# Altium PCB ERM_OPTO_Long.PcbDoc (part 1 of 2)
Units mil, origin at the board's own origin, x right, y up, seen from the top; angles counter-clockwise.
Board outline 4606.3 x 1102.36 mil, 7 copper layers (Layer_1 Top, Layer_2 GND Plane 1, Layer_3 Inner Signal 1, Layer_4 GND Plane 2, Layer_5 Inner Signal 2, Layer_6 GND Plane 3, Layer_7 Bottom), stack 37.12 mil thick; 33 components, 65 nets, 204 pads, 130 vias.
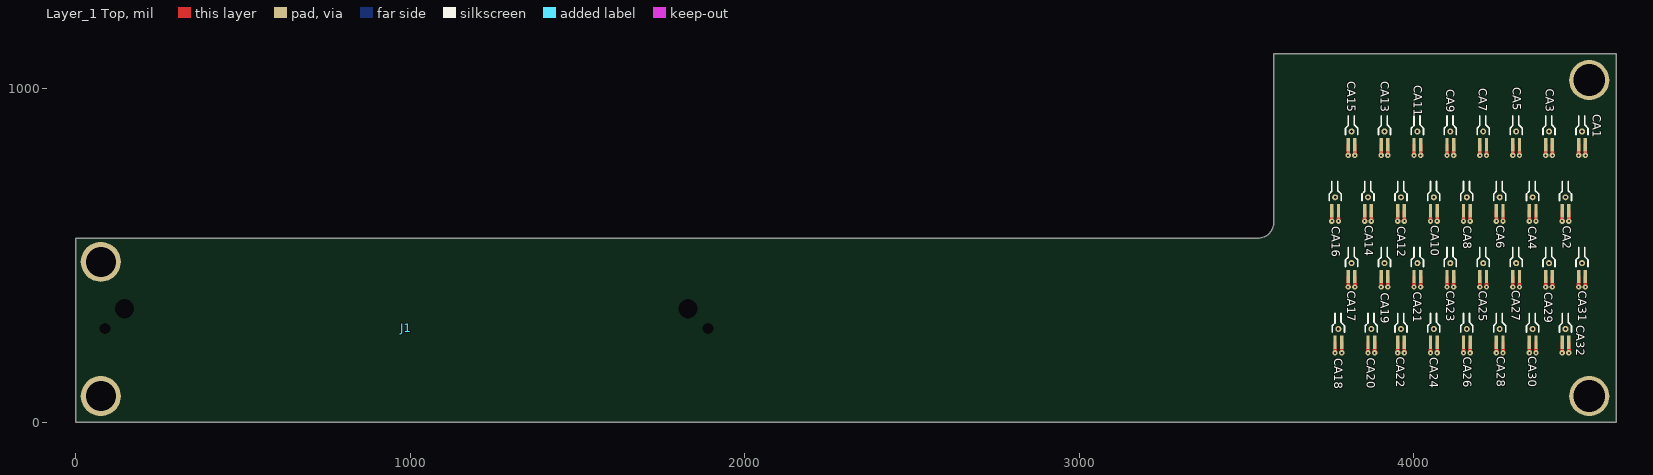
[diagram p0: Layer_1 Top view]
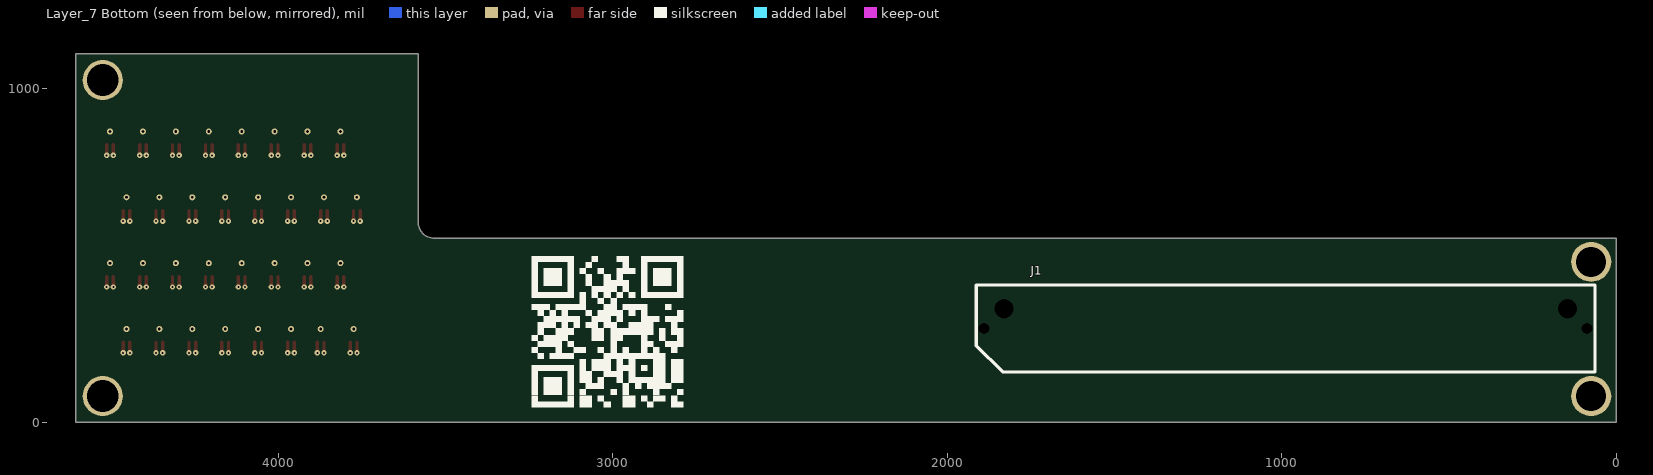
[diagram p1: Layer_7 Bottom view, seen from below]
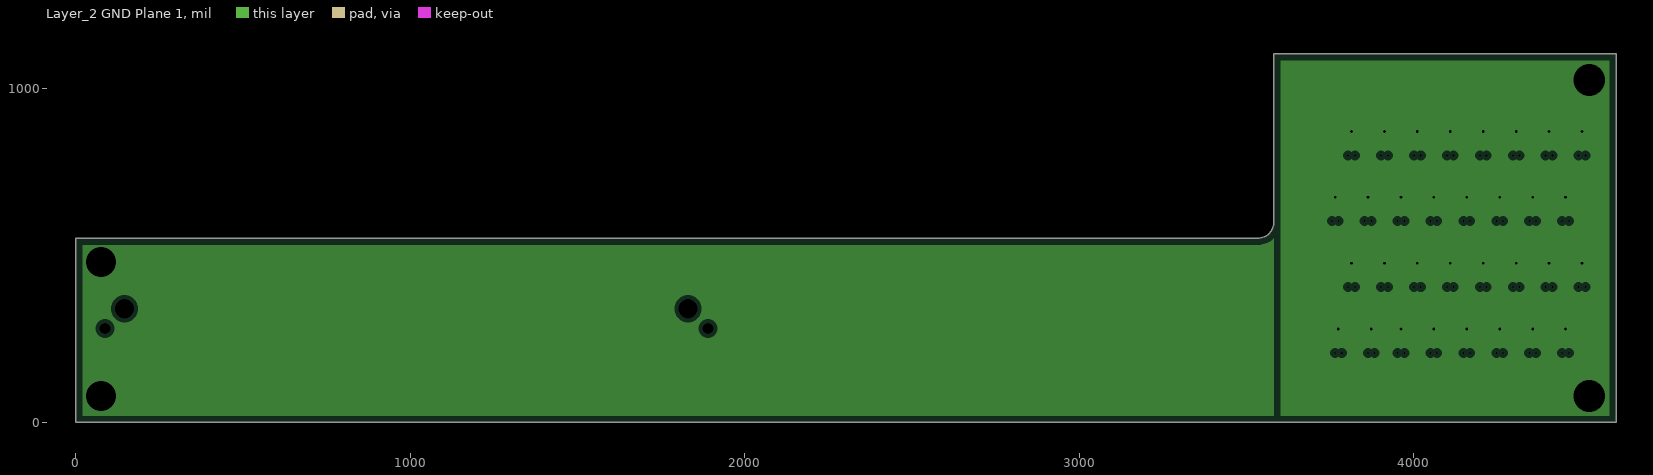
[diagram p2: Layer_2 GND Plane 1, clearances drawn from the general rule]
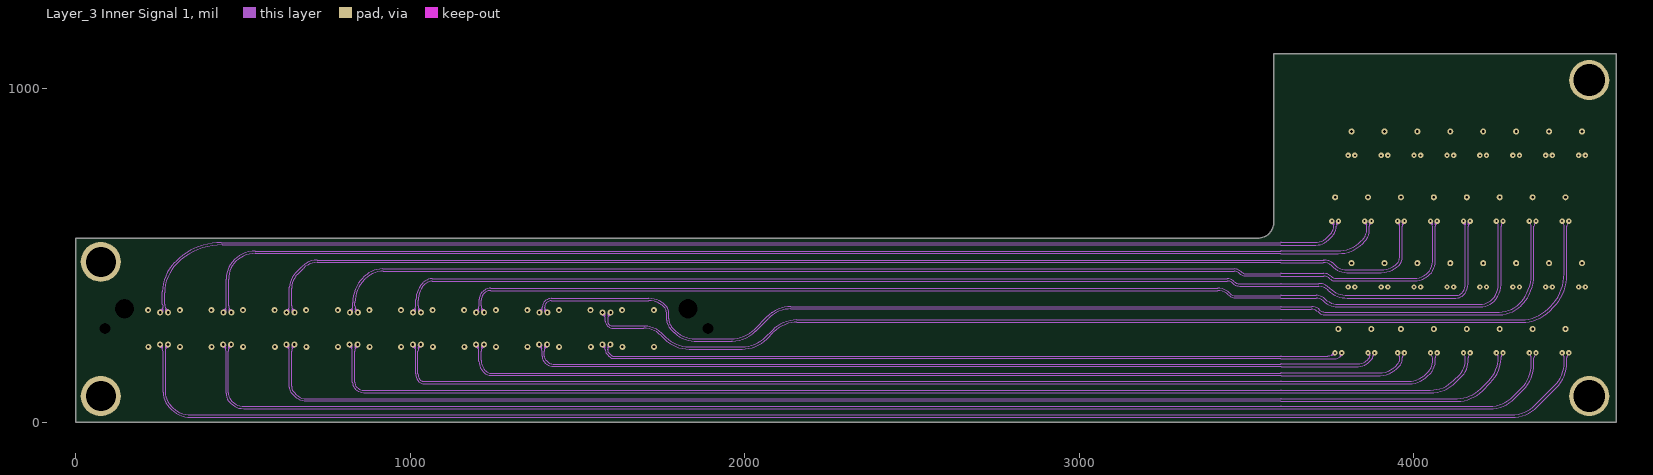
[diagram p3: Layer_3 Inner Signal 1]
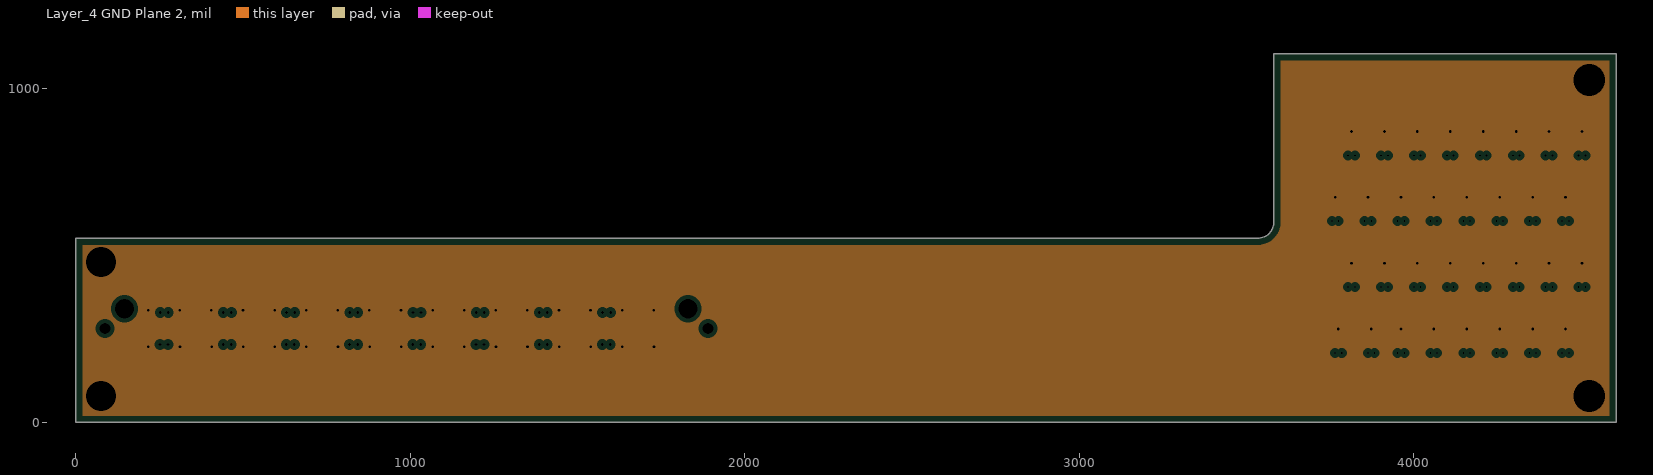
[diagram p4: Layer_4 GND Plane 2, clearances drawn from the general rule]
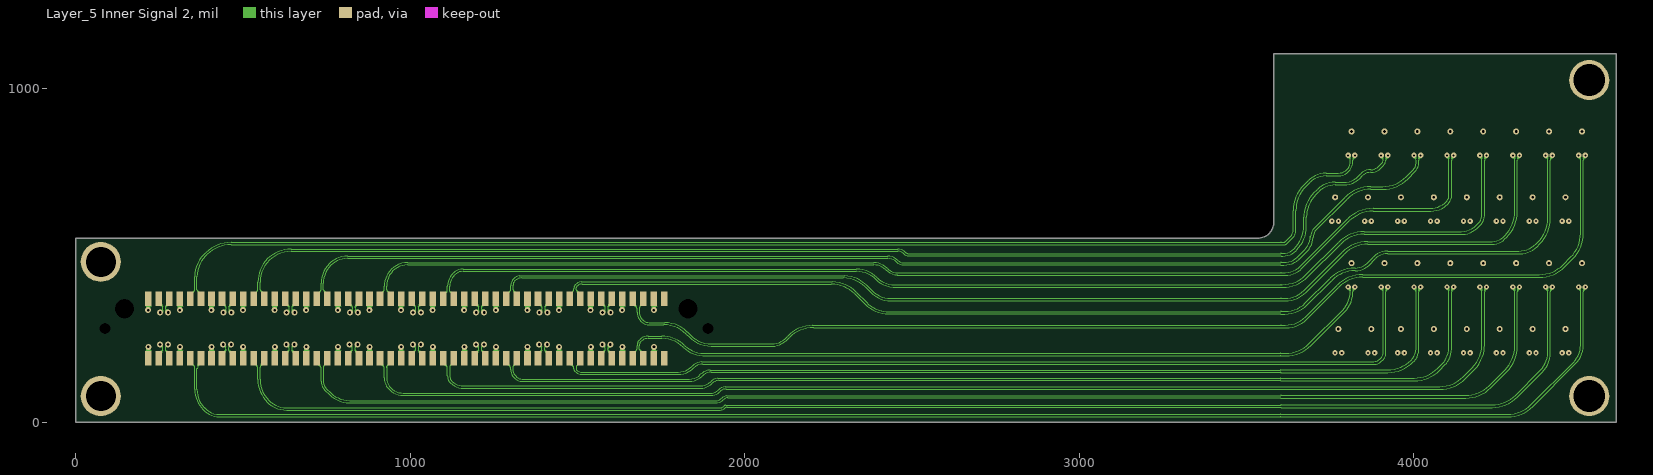
[diagram p5: Layer_5 Inner Signal 2]
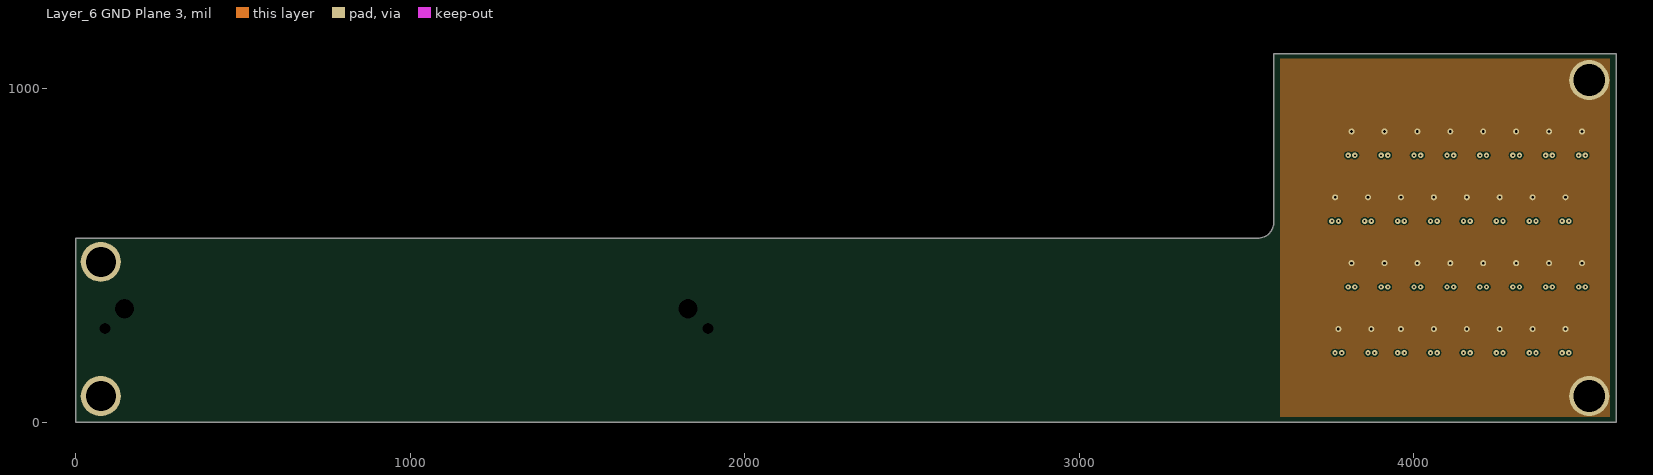
[diagram p6: Layer_6 GND Plane 3]

## Layer stack, top to bottom
Flex Region Top Coverlay 1: solder mask 0.4, Solder Resist, Dk 3.5
Flex Region Top Coverlay 1: solder mask 0.472, FC-002, Dk 3.9
Layer_1 Top: signal copper 0.7
Dielectric 1: core 6.6, I-TERA MT40, Dk 3.45
Layer_2 GND Plane 1: plane copper 1.4, net GND
Dielectric 2: prepreg 2.76, Composite dielectric, Dk 3.48
Dielectric 2a: prepreg 4.2, FR0110, Dk 3.9
Layer_3 Inner Signal 1: signal copper 0.5
Dielectric 3: prepreg 3, Composite dielectric, Dk 3
Dielectric 3a: prepreg 0.9, Composite dielectric, Dk 3
Layer_4 GND Plane 2: plane copper 0.5, net GND
Dielectric 4: core 3, RF775-RA, Dk 3
Layer_5 Inner Signal 2: signal copper 0.5
Dielectric 5: prepreg 1.6, Composite dielectric, Dk 3.48
Dielectric 5a: prepreg 2.76, Composite dielectric, Dk 3.48
Layer_6 GND Plane 3: signal copper 1.4
Dielectric 6: core 6.6, I-TERA MT40, Dk 3.45
Layer_7 Bottom: signal copper 0.7
Flex Region Bottom Coverlay 1: solder mask 0.05, FC-100, Dk 3.4

## Board outline
3582.68,598.43 3581.81,591.54 3580.71,586.76 3579.87,583.71 3578.74,580.83 3577.76,578.74 3576.82,576.75 3575.88,574.76 3574.8,572.83 3571.77,568.96 3569.71,566.07 3565.87,562.23 3560.04,558.07 3554.13,555.12 3549.31,553.15 3544.29,552.17 3539.28,551.18 3531.5,551.18 0,551.18 0,0 4606.3,0 4606.3,1102.36 3582.68,1102.36
board region "Default Layer Stack Region": 1968.5,0 0,0 0,551.18 1968.5,551.18
board region "Default Layer Stack Region": 3582.68,0 1968.5,0 1968.5,551.18 3531.5,551.18 3539.28,551.18 3544.29,552.17 3549.31,553.15 3554.13,555.12 3560.04,558.07 3565.87,562.23 3569.71,566.07 3571.77,568.96 3574.8,572.83 3575.88,574.76 3576.82,576.75 3577.76,578.74 3578.74,580.83 3579.87,583.71 3580.71,586.76 3581.81,591.54 3582.68,598.43
board region "Default Layer Stack Region": 3582.68,1102.36 4606.3,1102.36 4606.3,0 3582.68,0

## Design rules (kind name [scope] priority, off if disabled: settings)
Clearance [All] p1: gap=4 ignorepadtopadclearanceinfootprint=FALSE except(3.74: Arc-Arc Arc-Track Arc-SMDPad Track-Track Track-SMDPad SMDPad-SMDPad; 4.02: Arc-Hole Track-Hole SMDPad-Hole Via-Hole Fill-Hole Poly-Hole Region-Hole Text-Hole; 7.56: THPad-Hole)
ComponentClearance [All] p1: gap=0 collisioncheckmode=3 verticalgap=0 showdistances=FALSE
DiffPairsRouting "DiffPairsRouting L1" [InDifferentialPairClass('All Differential Pairs')] p1: maxlimit=20 minlimit=3 mostfreqgap=10 toplayer_mingap=10 toplayer_minwidth=10 toplayer_maxwidth=20 toplayer_prefwidth=10 midlayer1_mingap=3.74 midlayer1_prefgap=3.74 midlayer1_minwidth=2.95 midlayer1_maxwidth=20 midlayer1_prefwidth=2.97 midlayer2_mingap=3.74 midlayer2_prefgap=3.74 midlayer2_minwidth=2.95 midlayer2_maxwidth=20 midlayer2_prefwidth=2.97 midlayer3_prefgap=5 midlayer3_minwidth=1 midlayer3_maxwidth=20 midlayer3_prefwidth=5.5 bottomlayer_mingap=10 bottomlayer_minwidth=10 bottomlayer_maxwidth=20 bottomlayer_prefwidth=10 substack1={8003F175-BBFD-4856-87BE-DD2012BE8F80} toplayer_{8003f175-bbfd-4856-87be-dd2012be8f80}_mingap=5.12 toplayer_{8003f175-bbfd-4856-87be-dd2012be8f80}_prefgap=5.12 toplayer_{8003f175-bbfd-4856-87be-dd2012be8f80}_minwidth=2.95 toplayer_{8003f175-bbfd-4856-87be-dd2012be8f80}_maxwidth=15 toplayer_{8003f175-bbfd-4856-87be-dd2012be8f80}_prefwidth=2.95 midlayer1_{8003f175-bbfd-4856-87be-dd2012be8f80}_mingap=5.12 midlayer1_{8003f175-bbfd-4856-87be-dd2012be8f80}_prefgap=5.12 midlayer1_{8003f175-bbfd-4856-87be-dd2012be8f80}_minwidth=2.95 midlayer1_{8003f175-bbfd-4856-87be-dd2012be8f80}_maxwidth=15 midlayer1_{8003f175-bbfd-4856-87be-dd2012be8f80}_prefwidth=2.95 midlayer2_{8003f175-bbfd-4856-87be-dd2012be8f80}_mingap=5.12 midlayer2_{8003f175-bbfd-4856-87be-dd2012be8f80}_prefgap=5.12 midlayer2_{8003f175-bbfd-4856-87be-dd2012be8f80}_minwidth=2.95 midlayer2_{8003f175-bbfd-4856-87be-dd2012be8f80}_maxwidth=15 midlayer2_{8003f175-bbfd-4856-87be-dd2012be8f80}_prefwidth=2.95 midlayer3_{8003f175-bbfd-4856-87be-dd2012be8f80}_mingap=5.12 midlayer3_{8003f175-bbfd-4856-87be-dd2012be8f80}_prefgap=5.12 midlayer3_{8003f175-bbfd-4856-87be-dd2012be8f80}_minwidth=2.95 midlayer3_{8003f175-bbfd-4856-87be-dd2012be8f80}_maxwidth=15 midlayer3_{8003f175-bbfd-4856-87be-dd2012be8f80}_prefwidth=2.95 bottomlayer_{8003f175-bbfd-4856-87be-dd2012be8f80}_mingap=5.12 bottomlayer_{8003f175-bbfd-4856-87be-dd2012be8f80}_prefgap=5.12 bottomlayer_{8003f175-bbfd-4856-87be-dd2012be8f80}_minwidth=2.95 bottomlayer_{8003f175-bbfd-4856-87be-dd2012be8f80}_maxwidth=15 bottomlayer_{8003f175-bbfd-4856-87be-dd2012be8f80}_prefwidth=2.95 maxuncoupledlength=1000
DiffPairsRouting "DiffPairsRouting L3" [InDifferentialPairClass('All Differential Pairs')] p2: maxlimit=20 minlimit=3 mostfreqgap=10 toplayer_mingap=10 toplayer_minwidth=10 toplayer_maxwidth=20 toplayer_prefwidth=10 midlayer1_mingap=3.74 midlayer1_prefgap=3.74 midlayer1_minwidth=2.95 midlayer1_maxwidth=20 midlayer1_prefwidth=2.97 midlayer2_mingap=3.74 midlayer2_prefgap=3.74 midlayer2_minwidth=2.95 midlayer2_maxwidth=20 midlayer2_prefwidth=2.97 midlayer3_prefgap=5 midlayer3_minwidth=1 midlayer3_maxwidth=20 midlayer3_prefwidth=5.5 bottomlayer_mingap=10 bottomlayer_minwidth=10 bottomlayer_maxwidth=20 bottomlayer_prefwidth=10 substack1={8003F175-BBFD-4856-87BE-DD2012BE8F80} toplayer_{8003f175-bbfd-4856-87be-dd2012be8f80}_mingap=5.12 toplayer_{8003f175-bbfd-4856-87be-dd2012be8f80}_prefgap=5.12 toplayer_{8003f175-bbfd-4856-87be-dd2012be8f80}_minwidth=2.95 toplayer_{8003f175-bbfd-4856-87be-dd2012be8f80}_maxwidth=15 toplayer_{8003f175-bbfd-4856-87be-dd2012be8f80}_prefwidth=2.95 midlayer1_{8003f175-bbfd-4856-87be-dd2012be8f80}_mingap=5.12 midlayer1_{8003f175-bbfd-4856-87be-dd2012be8f80}_prefgap=5.12 midlayer1_{8003f175-bbfd-4856-87be-dd2012be8f80}_minwidth=2.95 midlayer1_{8003f175-bbfd-4856-87be-dd2012be8f80}_maxwidth=15 midlayer1_{8003f175-bbfd-4856-87be-dd2012be8f80}_prefwidth=2.95 midlayer2_{8003f175-bbfd-4856-87be-dd2012be8f80}_mingap=5.12 midlayer2_{8003f175-bbfd-4856-87be-dd2012be8f80}_prefgap=5.12 midlayer2_{8003f175-bbfd-4856-87be-dd2012be8f80}_minwidth=2.95 midlayer2_{8003f175-bbfd-4856-87be-dd2012be8f80}_maxwidth=15 midlayer2_{8003f175-bbfd-4856-87be-dd2012be8f80}_prefwidth=2.95 midlayer3_{8003f175-bbfd-4856-87be-dd2012be8f80}_mingap=5.12 midlayer3_{8003f175-bbfd-4856-87be-dd2012be8f80}_prefgap=5.12 midlayer3_{8003f175-bbfd-4856-87be-dd2012be8f80}_minwidth=2.95 midlayer3_{8003f175-bbfd-4856-87be-dd2012be8f80}_maxwidth=15 midlayer3_{8003f175-bbfd-4856-87be-dd2012be8f80}_prefwidth=2.95 bottomlayer_{8003f175-bbfd-4856-87be-dd2012be8f80}_mingap=5.12 bottomlayer_{8003f175-bbfd-4856-87be-dd2012be8f80}_prefgap=5.12 bottomlayer_{8003f175-bbfd-4856-87be-dd2012be8f80}_minwidth=2.95 bottomlayer_{8003f175-bbfd-4856-87be-dd2012be8f80}_maxwidth=15 bottomlayer_{8003f175-bbfd-4856-87be-dd2012be8f80}_prefwidth=2.95 maxuncoupledlength=1000
HoleSize [All] p1: absolutevalues=TRUE maxlimit=300 minlimit=5 maxpercent=80.000 minpercent=20.000
HoleToHoleClearance [All] p1: gap=8 allowstackedmicrovias=TRUE
MinimumSolderMaskSliver [All] p1: minsoldermaskwidth=2
NetAntennae [All] p1: netantennaetolerance=1
PlaneClearance [All] p1: clearance=12
PlaneConnect [All] p1: planeconnectstyle=Direct reliefexpansion=12 reliefentries=4 reliefconductorwidth=12 reliefairgap=10
PlaneConnect PlaneConnect_VIA [All] p2: planeconnectstyle=Direct reliefexpansion=15 reliefentries=4 reliefconductorwidth=12 reliefairgap=10
PolygonConnect [ispad] p1: connectstyle=Direct reliefconductorwidth=12 reliefentries=4 polygonreliefangle="45 Angle" airgapwidth=10
PolygonConnect PolygonConnect_VIA [isvia] p2: connectstyle=Direct reliefconductorwidth=12 reliefentries=4 polygonreliefangle="90 Angle" airgapwidth=10
RoutingCorners [All] p1: cornerstyle=45-Degree minsetback=50 maxsetback=50
RoutingVias [All] p1: holewidth=8 width=18 viastyle="Through Hole" minholewidth=5 minwidth=10 maxholewidth=100 maxwidth=200
RoutingVias RoutingVias_1 [All] p2: holewidth=8 width=18 viastyle="Through Hole" minholewidth=6 minwidth=12 maxholewidth=100 maxwidth=200
SilkToSilkClearance [All] p1: silktosilkclearance=1
SilkToSolderMaskClearance SilkscreenOverComponentPads [IsPad] p1: minsilkscreentomaskgap=1 clearancetoexposedcopper=TRUE
SolderMaskExpansion [All] p1: expansion=2 istentingtop=FALSE
Width [All] p1: maxlimit=100 minlimit=1 preferedwidth=8 substack1={8003F175-BBFD-4856-87BE-DD2012BE8F80} minimp=50.000000 maximp=50.000000 favimp=50.000000
19 further rules are at their usual default settings.

## Classes and differential pairs
differential pair DOWNLINK6: +DOWNLINK6_P -DOWNLINK6_N
differential pair UPLINK23: +UPLINK23_P -UPLINK23_N
differential pair UPLINK22: +UPLINK22_P -UPLINK22_N
differential pair UPLINK21: +UPLINK21_P -UPLINK21_N
differential pair UPLINK20: +UPLINK20_P -UPLINK20_N
differential pair UPLINK19: +UPLINK19_P -UPLINK19_N
differential pair UPLINK18: +UPLINK18_P -UPLINK18_N
differential pair UPLINK17: +UPLINK17_P -UPLINK17_N
differential pair UPLINK16: +UPLINK16_P -UPLINK16_N
differential pair UPLINK15: +UPLINK15_P -UPLINK15_N
differential pair UPLINK14: +UPLINK14_P -UPLINK14_N
differential pair UPLINK13: +UPLINK13_P -UPLINK13_N
differential pair UPLINK12: +UPLINK12_P -UPLINK12_N
differential pair UPLINK11: +UPLINK11_P -UPLINK11_N
differential pair UPLINK10: +UPLINK10_P -UPLINK10_N
differential pair UPLINK9: +UPLINK9_P -UPLINK9_N
differential pair UPLINK8: +UPLINK8_P -UPLINK8_N
differential pair UPLINK7: +UPLINK7_P -UPLINK7_N
differential pair UPLINK6: +UPLINK6_P -UPLINK6_N
differential pair UPLINK5: +UPLINK5_P -UPLINK5_N
differential pair UPLINK4: +UPLINK4_P -UPLINK4_N
differential pair UPLINK3: +UPLINK3_P -UPLINK3_N
differential pair UPLINK2: +UPLINK2_P -UPLINK2_N
differential pair UPLINK1: +UPLINK1_P -UPLINK1_N
differential pair UPLINK0: +UPLINK0_P -UPLINK0_N
differential pair DOWNLINK7: +DOWNLINK7_P -DOWNLINK7_N
differential pair DOWNLINK5: +DOWNLINK5_P -DOWNLINK5_N
differential pair DOWNLINK4: +DOWNLINK4_P -DOWNLINK4_N
differential pair DOWNLINK3: +DOWNLINK3_P -DOWNLINK3_N
differential pair DOWNLINK2: +DOWNLINK2_P -DOWNLINK2_N
differential pair DOWNLINK1: +DOWNLINK1_P -DOWNLINK1_N
differential pair DOWNLINK0: +DOWNLINK0_P -DOWNLINK0_N

## Components (designator, comment, footprint, x,y, rotation, side; value= is the part's Value field where it differs from the comment)
CA1 "Molex_Cable_100068-0052" MOLEX_CABLE_100068-0052_NO_VIA 4503.94,870.08 r270 top
CA2 "Molex_Cable_100068-0052" MOLEX_CABLE_100068-0052_NO_VIA 4454.72,673.23 r270 top
CA3 "Molex_Cable_100068-0052" MOLEX_CABLE_100068-0052_NO_VIA 4405.51,870.08 r270 top
CA4 "Molex_Cable_100068-0052" MOLEX_CABLE_100068-0052_NO_VIA 4356.3,673.23 r270 top
CA5 "Molex_Cable_100068-0052" MOLEX_CABLE_100068-0052_NO_VIA 4307.09,870.08 r270 top
CA6 "Molex_Cable_100068-0052" MOLEX_CABLE_100068-0052_NO_VIA 4257.87,673.23 r270 top
CA7 "Molex_Cable_100068-0052" MOLEX_CABLE_100068-0052_NO_VIA 4208.66,870.08 r270 top
CA8 "Molex_Cable_100068-0052" MOLEX_CABLE_100068-0052_NO_VIA 4159.45,673.23 r270 top
CA9 "Molex_Cable_100068-0052" MOLEX_CABLE_100068-0052_NO_VIA 4110.24,870.08 r270 top
CA10 "Molex_Cable_100068-0052" MOLEX_CABLE_100068-0052_NO_VIA 4061.02,673.23 r270 top
CA11 "Molex_Cable_100068-0052" MOLEX_CABLE_100068-0052_NO_VIA 4011.81,870.08 r270 top
CA12 "Molex_Cable_100068-0052" MOLEX_CABLE_100068-0052_NO_VIA 3962.6,673.23 r270 top
CA13 "Molex_Cable_100068-0052" MOLEX_CABLE_100068-0052_NO_VIA 3913.39,870.08 r270 top
CA14 "Molex_Cable_100068-0052" MOLEX_CABLE_100068-0052_NO_VIA 3864.17,673.23 r270 top
CA15 "Molex_Cable_100068-0052" MOLEX_CABLE_100068-0052_NO_VIA 3814.96,870.08 r270 top
CA16 "Molex_Cable_100068-0052" MOLEX_CABLE_100068-0052_NO_VIA 3765.75,673.23 r270 top
CA17 "Molex_Cable_100068-0052" MOLEX_CABLE_100068-0052_NO_VIA 3814.96,476.38 r270 top
CA18 "Molex_Cable_100068-0052" MOLEX_CABLE_100068-0052_NO_VIA 3775.59,279.53 r270 top
CA19 "Molex_Cable_100068-0052" MOLEX_CABLE_100068-0052_NO_VIA 3913.39,476.38 r270 top
CA20 "Molex_Cable_100068-0052" MOLEX_CABLE_100068-0052_NO_VIA 3874.02,279.53 r270 top
CA21 "Molex_Cable_100068-0052" MOLEX_CABLE_100068-0052_NO_VIA 4011.81,476.38 r270 top
CA22 "Molex_Cable_100068-0052" MOLEX_CABLE_100068-0052_NO_VIA 3962.6,279.53 r270 top
CA23 "Molex_Cable_100068-0052" MOLEX_CABLE_100068-0052_NO_VIA 4110.24,476.38 r270 top
CA24 "Molex_Cable_100068-0052" MOLEX_CABLE_100068-0052_NO_VIA 4061.02,279.53 r270 top
CA25 "Molex_Cable_100068-0052" MOLEX_CABLE_100068-0052_NO_VIA 4208.66,476.38 r270 top
CA26 "Molex_Cable_100068-0052" MOLEX_CABLE_100068-0052_NO_VIA 4159.45,279.53 r270 top
CA27 "Molex_Cable_100068-0052" MOLEX_CABLE_100068-0052_NO_VIA 4307.09,476.38 r270 top
CA28 "Molex_Cable_100068-0052" MOLEX_CABLE_100068-0052_NO_VIA 4257.87,279.53 r270 top
CA29 "Molex_Cable_100068-0052" MOLEX_CABLE_100068-0052_NO_VIA 4405.51,476.38 r270 top
CA30 "Molex_Cable_100068-0052" MOLEX_CABLE_100068-0052_NO_VIA 4356.3,279.53 r270 top
CA31 "Molex_Cable_100068-0052" MOLEX_CABLE_100068-0052_NO_VIA 4503.94,476.38 r270 top
CA32 "Molex_Cable_100068-0052" MOLEX_CABLE_100068-0052_NO_VIA 4454.72,279.53 r270 top
J1 "ERF8-050-XX.X-X-DV" ERF8-050-XX.X-X-DV 988.48,280.92 r0 top

## Footprints (in the part's own frame and the unit in brackets; to place one, negate y for a bottom-side part, rotate by r counter-clockwise, add the part's x,y. Pads: shape width x height; smd on the part's side, far side on the other; paste and mask are expansions set on the pad)
ERF8-050-XX.X-X-DV [mm]
  rect 0.5x1.1 on Mid2 mask+0.05: 1(19.6,-2.25) 2(19.6,2.25) 3(18.8,-2.25) 4(18.8,2.25) 5(18,-2.25) 6(18,2.25) 7(17.2,-2.25) 8(17.2,2.25) 9(16.4,-2.25) 10(16.4,2.25) 11(15.6,-2.25) 12(15.6,2.25) 13(14.8,-2.25) 14(14.8,2.25) 15(14,-2.25) 16(14,2.25) 17(13.2,-2.25) 18(13.2,2.25) 19(12.4,-2.25) 20(12.4,2.25) 21(11.6,-2.25) 22(11.6,2.25) 23(10.8,-2.25) 24(10.8,2.25) 25(10,-2.25) 26(10,2.25) 27(9.2,-2.25) 28(9.2,2.25) 29(8.4,-2.25) 30(8.4,2.25) 31(7.6,-2.25) 32(7.6,2.25) 33(6.8,-2.25) 34(6.8,2.25) 35(6,-2.25) 36(6,2.25) 37(5.2,-2.25) 38(5.2,2.25) 39(4.4,-2.25) 40(4.4,2.25) 41(3.6,-2.25) 42(3.6,2.25) 43(2.8,-2.25) 44(2.8,2.25) 45(2,-2.25) 46(2,2.25) 47(1.2,-2.25) 48(1.2,2.25) 49(0.4,-2.25) 50(0.4,2.25) 51(-0.4,-2.25) 52(-0.4,2.25) 53(-1.2,-2.25) 54(-1.2,2.25) 55(-2,-2.25) 56(-2,2.25) 57(-2.8,-2.25) 58(-2.8,2.25) 59(-3.6,-2.25) 60(-3.6,2.25) 61(-4.4,-2.25) 62(-4.4,2.25) 63(-5.2,-2.25) 64(-5.2,2.25) 65(-6,-2.25) 66(-6,2.25) 67(-6.8,-2.25) 68(-6.8,2.25) 69(-7.6,-2.25) 70(-7.6,2.25) 71(-8.4,-2.25) 72(-8.4,2.25) 73(-9.2,-2.25) 74(-9.2,2.25) 75(-10,-2.25) 76(-10,2.25) 77(-10.8,-2.25) 78(-10.8,2.25) 79(-11.6,-2.25) 80(-11.6,2.25) 81(-12.4,-2.25) 82(-12.4,2.25) 83(-13.2,-2.25) 84(-13.2,2.25) 85(-14,-2.25) 86(-14,2.25) 87(-14.8,-2.25) 88(-14.8,2.25) 89(-15.6,-2.25) 90(-15.6,2.25) 91(-16.4,-2.25) 92(-16.4,2.25) 93(-17.2,-2.25) 94(-17.2,2.25) 95(-18,-2.25) 96(-18,2.25) 97(-18.8,-2.25) 98(-18.8,2.25) 99(-19.6,-2.25) 100(-19.6,2.25)
  round 0 hole 1.45 unplated: MH1(21.4,1.5) MH2(-21.4,1.5)
  round 0 hole 0.83 unplated: MH2(-22.9,0) MH2(22.9,0)
  body extent -23.75,-2.8 23.75,2.8, height 5.3
MOLEX_CABLE_100068-0052_NO_VIA [mil] "SM1206 EMI Filter"
  rect 40x10 smd: 1(40,10) 2(40,-10)
  round 18 hole 8: 3(0,0)
  silkscreen extent -47,-18 10,18

## Part data
CA1 CA2 CA3 CA4 CA5 CA6 CA7 CA8 CA9 CA10 CA11 CA12 CA13 CA14 CA15 CA16 CA17 CA18 CA19 CA20 CA21 CA22 CA23 CA24 CA25 CA26 CA27 CA28 CA29 CA30 CA31 CA32: library part Molex_Cable_100068-0052_No_Via, "Molex; 100068-0052, Twinax Cable 34AWG 100 Ohms", Manufacturer=Molex, Manufacturer Part Number=100068-0052, Package / Case=Molex_100068-0052, Unit_Price_Static=25.00
J1: "Socket Assembly, Double Row Vertical, Surface Mount, 0.8mm Pitch, 100 Pins", Manufacturer=SAMTEC, Manufacturer Part Number=ERF8-050-05.0-S-DV, CREATED="October 23, 2014 - Wendy Xin", Package / Case=ERF8-050-05.0-S-DV, PCB DECAL=ERF8-050-XX.X-X-DV, Unit_Price_Static=7.00

## Free pads (board coordinates)
  round 120 hole 90: 1(74.8,78.74) 1(74.8,480.32)
  round 120 hole 95: 1(4525.59,78.74) 1(4525.59,1023.62)

## Via types
v1: diameter 18, hole 8, Layer_3 Inner Signal 1 to Layer_5 Inner Signal 2, tented both sides, 66 vias
v2: diameter 16, hole 6, Layer_1 Top to Layer_7 Bottom, tented both sides, 64 vias

## Nets (pads, with @x,y where several pads share a name; then routed paths per layer and width w, separated by ;. In a path a pad name is that pad's centre, name@x,y a point inside that pad or via, vN(x,y) a via of type N, cw(c..) or ccw(c..) an arc to the next point about the centre after c; other vN are vias at no path point)
DOWNLINK0_N: CA24.1 J1.49 | length 3298
  Layer_1 Top w10: v2(4071.02,208.03) CA24.1@4071.02,239.53
  Layer_3 Inner Signal 1 w2.95: v1(1007.69,233.27) cw(c986.79,212.38) 1016.34,212.38 1016.34,145.25 ccw(c1049.21,145.25) 1025.97,122.01 1026.06,121.91 ccw(c1040.18,136.03) 1040.18,116.06 1087.28,116.06 3582.72,116.06 3602.52,116.06 cw(c3602.52,114.37) 3603.72,115.57 3603.99,115.3 3987.85,115.3 ccw(c3987.85,191.06) 4041.42,137.49 4051.22,147.29 ccw(c4017.82,180.69) 4051.26,147.33 ccw(c4017.82,180.69) 4065.06,180.69 4065.06,193.63 cw(c4079.9,193.63) 4066.77,200.55 cw(c4079.9,193.63) 4069.41,204.12 ccw(c4065.5,208.03) v2(4071.02,208.03)
  Layer_5 Inner Signal 2 w3: J1.49@1004.23,192.33 cw(c1032.75,192.33) 1012.58,212.5 1013.74,213.65 ccw(c1007.95,219.44) 1016.14,219.44 ccw(c1003.17,219.44) 1012.34,228.62 v1(1007.69,233.27)
DOWNLINK0_P: CA24.2 J1.47 | length 3281
  Layer_1 Top w10: v2(4051.02,208.03) CA24.2@4051.02,239.53
  Layer_3 Inner Signal 1 w2.95: v1(1031.69,233.27) ccw(c1052.58,212.38) 1023.03,212.38 1023.03,145.32 ccw(c1049.38,145.32) 1030.75,126.69 ccw(c1040.25,136.2) 1040.25,122.76 3582.64,122.76 3602.52,122.76 cw(c3604,121.28) 3604,123.37 3626.96,123.37 3682.51,123.37 3963.66,123.37 3984.51,123.37 ccw(c3984.51,199.13) 4038.05,145.53 ; 4038.08,145.56 4045.47,152.95 ccw(c4017.67,180.75) 4056.99,180.75 4056.99,193.63 ccw(c4042.15,193.63) 4055.28,200.55 ccw(c4042.15,193.63) 4052.64,204.12 cw(c4056.55,208.03) v2(4051.02,208.03)
  Layer_5 Inner Signal 2 w3: v1(1031.69,233.27) 1026.71,228.29 ccw(c1034.77,220.23) 1023.37,220.23 ccw(c1032.37,220.23) 1026.01,213.87 cw(c1006.45,194.31) 1034.11,194.31 J1.47@1034.11,201.4 ; J1.47@1034.36,193.71 J1.47@1035.73,192.33
DOWNLINK1_N: CA17.2 J1.7 | length 2343.9
  Layer_1 Top w10: v2(3804.96,404.88) CA17.2@3804.96,436.38
  Layer_5 Inner Signal 2 w2.95: J1.7@1665.65,192.33 cw(c1695.28,192.33) 1674.33,213.28 1675.21,214.17 ccw(c1667.52,221.86) 1678.4,221.86 1678.4,229.64 cw(c1710.36,229.64) 1679.73,238.79 ; 1678.4,232.13 cw(c1695.66,232.13) 1679.73,238.79 ; v2(3804.96,404.88) ccw(c3810.49,404.88) 3806.58,400.97 cw(c3796.09,390.48) 3810.93,390.48 cw(c3734.15,390.48) 3809.49,375.71 cw(c3734.15,390.48) 3788.44,336.19 3688.34,236.1 cw(c3617.63,306.81) 3617.63,206.81 3603.8,206.81 ccw(c3603.8,204.72) 3602.32,206.2 1877.52,206.2 cw(c1877.52,285.42) 1821.5,229.4 ccw(c1752.45,160.35) 1784.79,252.49 ccw(c1752.45,160.35) 1752.45,258 1712.05,258 ccw(c1712.05,221.95) 1686.56,247.44 1683.45,244.34 ccw(c1695.66,232.13) 1679.73,238.79
DOWNLINK1_P: CA17.1 J1.5 | length 2339.1
  Layer_1 Top w10: v2(3824.96,404.88) CA17.1@3824.96,436.38
  Layer_5 Inner Signal 2 w2.95: J1.5@1697.14,192.33 ccw(c1663.48,192.33) 1687.77,215.64 ccw(c1663.48,192.33) 1687.22,216.2 cw(c1694.26,223.11) 1685.09,219.48 1685.09,229.64 cw(c1710.36,229.64) 1685.98,236.3 cw(c1688.82,235.48) 1686.15,236.75 cw(c1695.66,232.13) 1688.21,239.63 1691.26,242.68 cw(c1712.05,221.95) 1712.05,251.31 1752.45,251.31 cw(c1752.45,160.35) 1816.89,224.54 ccw(c1877.52,285.42) 1874.26,199.57 cw(c1874.13,196.62) 1874.74,199.5 1877.39,199.5 ccw(c1877.52,285.42) 1877.57,199.5 3582.52,199.5 3602.32,199.5 cw(c3602.32,197.81) 3603.52,199.01 3603.79,198.74 3617.78,198.74 ccw(c3617.78,306.45) 3693.94,230.29 3794.17,330.51 ccw(c3734.24,390.45) 3817.93,377.07 ccw(c3734.24,390.45) 3819,390.45 ; 3819,390.48 cw(c3833.83,390.48) 3823.34,400.97 ccw(c3819.43,404.88) v2(3824.96,404.88)
DOWNLINK2_N: CA8.2 J1.50 | length 3526.6
  Layer_1 Top w10: v2(4149.45,601.73) CA8.2@4149.45,633.23
  Layer_3 Inner Signal 1 w2.95: v1(1008.27,328.57) ccw(c987.38,349.46) 1016.75,346.25 ccw(c987.38,349.46) 1016.93,349.46 1016.93,367.42 cw(c1085.93,367.42) 1026.87,403.1 cw(c1085.93,367.42) 1037.14,416.21 1039.46,418.53 cw(c1066.1,391.89) 1066.1,429.57 3443.59,429.57 cw(c3443.59,400.66) 3464.03,421.1 ; 3464.06,421.07 ccw(c3479.96,436.96) 3479.96,414.49 3602.48,414.49 cw(c3603.96,413.01) 3603.96,415.1 3717.16,415.1 cw(c3717.16,369.71) 3732.05,412.59 cw(c3717.16,369.71) 3749.25,401.81 3749.29,401.77 ccw(c3802.13,454.61) 3782.23,382.58 ccw(c3802.13,454.61) 3802.13,379.88 4127.03,379.88 ccw(c4127.03,404.35) 4144.33,387.05 ccw(c4117.58,413.8) 4155.41,413.8 4155.41,587.33 ccw(c4140.57,587.33) 4151.07,597.82 cw(c4154.97,601.73) v2(4149.45,601.73)
  Layer_5 Inner Signal 2 w3: J1.50@1004.23,369.5 J1.50@1005.6,368.13 ; J1.50@1005.85,360.43 1005.85,367.52 ccw(c1033.51,367.52) 1013.95,347.97 cw(c1007.59,341.61) 1016.59,341.61 cw(c1005.19,341.61) 1013.25,333.54 v1(1008.27,328.57)
DOWNLINK2_P: CA8.1 J1.48 | length 3522
  Layer_1 Top w10: v2(4169.45,601.73) CA8.1@4169.45,633.23
  Layer_3 Inner Signal 1 w2.95: v1(1032.27,328.57) cw(c1053.17,349.46) 1023.62,349.46 1023.62,364.65 cw(c1092.62,364.65) 1033.43,400.11 cw(c1092.62,364.65) 1043.83,413.44 1044.17,413.78 cw(c1066.13,391.82) 1066.13,422.87 3443.55,422.87 cw(c3443.55,400.56) 3459.33,416.34 3459.37,416.3 ccw(c3479.9,436.83) 3479.9,407.8 3602.48,407.8 cw(c3602.48,406.1) 3603.68,407.3 3603.95,407.03 3627.66,407.03 3717.11,407.03 cw(c3717.11,369.59) 3729.85,404.79 cw(c3717.11,369.59) 3743.58,396.06 3743.65,395.99 ccw(c3802.04,454.38) 3779.72,374.88 ccw(c3802.04,454.38) 3802.04,371.81 4127.13,371.81 ccw(c4127.13,404.12) 4149.97,381.27 4150.11,381.41 ccw(c4117.82,413.7) 4163.48,413.7 4163.48,587.33 cw(c4178.32,587.33) 4167.83,597.82 ccw(c4163.92,601.73) v2(4169.45,601.73)
  Layer_5 Inner Signal 2 w3: v1(1032.27,328.57) 1027.62,333.22 cw(c1036.79,342.39) 1023.82,342.39 cw(c1032.01,342.39) 1026.21,348.17 1027.38,349.34 ccw(c1007.21,369.5) J1.48@1035.73,369.5
DOWNLINK3_N: CA1.1 J1.8 | length 3321.2
  Layer_1 Top w10: v2(4513.94,798.58) CA1.1@4513.94,830.08
  Layer_5 Inner Signal 2 w2.95: J1.8@1665.65,369.5 ccw(c1699.31,369.5) 1675.51,345.69 cw(c1668.54,338.72) 1678.4,338.72 1678.4,330 ccw(c1716.74,330) 1689.63,302.89 1690.76,301.76 ccw(c1714.31,325.31) 1714.31,292 1758.51,292 cw(c1758.51,197.85) 1825.09,264.42 1833.76,255.76 ccw(c1900.77,322.77) 1900.77,228 2082.1,228 ccw(c2082.1,289.8) 2125.8,246.1 2133.06,253.36 cw(c2206.12,180.3) 2206.12,283.62 3602.56,283.62 cw(c3602.56,281.92) 3603.76,283.12 3604.03,282.86 3619.57,282.86 ccw(c3619.57,369.57) 3680.89,308.26 3777.32,404.69 cw(c3848.04,333.98) 3848.04,433.98 4376.56,433.98 ccw(c4376.56,541.88) 4452.86,465.58 4476.37,489.09 ccw(c4400.07,565.39) 4507.97,565.39 4507.97,784.18 cw(c4522.81,784.18) 4512.32,794.68 ccw(c4508.41,798.58) v2(4513.94,798.58)
DOWNLINK3_P: CA1.2 J1.6 | length 3308
  Layer_1 Top w10: v2(4493.94,798.58) CA1.2@4493.94,830.08
  Layer_5 Inner Signal 2 w2.95: J1.6@1697.14,369.5 cw(c1667.52,369.5) 1688.47,348.55 1687.58,347.67 ccw(c1695.27,339.98) 1685.02,343.61 ccw(c1687.81,342.64) 1685.09,341.5 1685.09,330 ccw(c1716.74,330) 1694.32,307.66 cw(c1692.27,305.54) 1694.38,307.6 1695.47,306.51 ccw(c1714.31,325.31) 1714.31,298.69 1761.29,298.69 ccw(c1761.85,301.59) 1761.73,298.64 cw(c1758.51,197.85) 1827.52,271.39 ccw(c1829.52,273.56) 1827.86,271.12 1829.82,269.16 ; 1829.84,269.14 1838.51,260.47 ccw(c1900.77,322.77) 1900.77,234.69 2082.1,234.69 ccw(c2082.1,289.8) 2121.09,250.86 2128.3,258.07 cw(c2206.12,180.3) 2202.93,290.27 ccw(c2202.81,293.22) 2203.35,290.31 3593.03,290.31 ; 3582.68,290.32 3602.56,290.32 cw(c3604.04,288.84) 3604.04,290.93 3616.23,290.93 ccw(c3616.23,377.65) 3677.52,316.3 3771.67,410.44 cw(c3847.97,334.15) 3847.97,442.05 4376.49,442.05 ccw(c4376.49,542.05) 4447.2,471.34 4470.61,494.75 ccw(c4399.9,565.46) 4499.9,565.46 4499.9,784.18 ccw(c4485.06,784.18) 4495.56,794.68 cw(c4499.46,798.58) v2(4493.94,798.58)
DOWNLINK4_N: CA32.1 J1.97 | length 4600.7
  Layer_1 Top w10: v2(4464.72,208.03) CA32.1@4464.72,239.53
  Layer_3 Inner Signal 1 w2.95: v1(251.78,233.27) cw(c230.05,211.54) 260.78,211.54 260.78,90.81 ccw(c324.21,90.81) 279.36,45.96 ccw(c344.68,101.26) 344.64,15.67 3582.64,15.67 3602.44,15.67 cw(c3602.44,13.97) 3603.64,15.17 3603.91,14.9 3627.62,14.9 ; 3603.98,14.9 4293.79,14.9 ccw(c4293.79,122.8) 4370.09,46.51 4427.16,103.58 ccw(c4350.86,179.87) 4458.76,179.87 4458.76,193.63 cw(c4473.6,193.63) 4460.47,200.55 cw(c4473.6,193.63) 4463.11,204.12 ccw(c4459.2,208.03) v2(4464.72,208.03)
  Layer_5 Inner Signal 2 w3: J1.97@248.33,192.33 cw(c276.84,192.33) 256.68,212.5 257.83,213.65 ccw(c252.04,219.44) 260.23,219.44 ccw(c247.26,219.44) 256.43,228.62 v1(251.78,233.27)
DOWNLINK4_P: CA32.2 J1.95 | length 4588.3
  Layer_1 Top w10: v2(4444.72,208.03) CA32.2@4444.72,239.53
  Layer_3 Inner Signal 1 w2.95: v1(275.78,233.27) 275,232.49 ccw(c293.18,214.31) 267.47,214.31 267.47,90.81 ccw(c324.21,90.81) 284.04,50.74 cw(c279.36,45.96) 284.49,50.25 ccw(c344.68,101.26) 344.55,22.36 3586.53,22.36 ; 3582.56,22.36 3602.44,22.36 cw(c3603.92,20.89) 3603.92,22.97 3626.88,22.97 ; 3602.83,22.97 3683.03,22.97 4092.24,22.97 4293.72,22.97 ccw(c4293.72,122.97) 4364.43,52.26 4421.4,109.23 ccw(c4350.69,179.94) 4450.69,179.94 4450.69,193.63 ccw(c4435.85,193.63) 4448.98,200.55 ccw(c4435.85,193.63) 4446.34,204.12 cw(c4450.25,208.03) v2(4444.72,208.03)
  Layer_5 Inner Signal 2 w3: v1(275.78,233.27) 270.8,228.29 ccw(c278.87,220.23) 267.46,220.23 ccw(c276.46,220.23) 270.1,213.87 cw(c250.54,194.31) 278.2,194.31 J1.95@278.2,201.4 ; J1.95@278.45,193.71 J1.95@279.82,192.33
DOWNLINK5_N: CA25.1 J1.55 | length 3664
  Layer_1 Top w10: v2(4218.66,404.88) CA25.1@4218.66,436.38
  Layer_5 Inner Signal 2 w2.95: J1.55@909.74,192.33 ccw(c943.41,192.33) 919.6,168.53 ; 919.63,168.5 cw(c912.63,161.56) 922.49,161.56 922.49,133.2 ccw(c971.2,133.2) 936.76,98.76 ccw(c979.89,141.89) 979.85,80.89 1898.86,80.89 ccw(c1898.86,118.14) 1925.2,91.8 cw(c1944.84,72.16) 1944.84,99.94 3602.44,99.94 cw(c3602.44,98.24) 3603.64,99.44 3603.91,99.17 4078.25,99.17 ccw(c4078.25,207.07) 4154.55,130.77 4182.83,159.06 ccw(c4110.73,231.16) 4211.65,216.61 ccw(c4110.73,231.16) 4212.7,231.16 4212.7,390.48 cw(c4227.54,390.48) 4217.04,400.97 ccw(c4213.14,404.88) v2(4218.66,404.88)
DOWNLINK5_P: CA25.2 J1.53 | length 3652.6
  Layer_1 Top w10: v2(4198.66,404.88) CA25.2@4198.66,436.38
  Layer_5 Inner Signal 2 w2.95: J1.53@941.24,192.33 cw(c911.61,192.33) 932.56,171.39 931.68,170.5 ccw(c939.37,162.81) 929.12,166.44 ccw(c931.91,165.48) 929.18,164.33 929.18,133.2 ccw(c971.2,133.2) 941.47,103.51 ccw(c979.89,141.89) 979.78,87.58 1898.94,87.58 ccw(c1898.86,118.14) 1920.44,96.51 cw(c1944.84,72.16) 1941.34,106.45 ccw(c1941.01,109.39) 1942.07,106.63 3594.57,106.63 ; 3582.56,106.63 3594.57,106.63 ; v2(4198.66,404.88) ccw(c4204.19,404.88) 4200.28,400.97 cw(c4189.79,390.48) 4204.63,390.48 4204.63,233.69 cw(c4104.63,233.69) 4203.58,219.28 cw(c4104.63,233.69) 4175.34,162.97 4148.89,136.53 cw(c4078.18,207.24) 4078.18,107.24 3626.88,107.24 3603.92,107.24 ccw(c3603.92,105.15) 3602.44,106.63 3594.57,106.63
DOWNLINK6_N: CA16.2 J1.98 | length 3770.9
  Layer_1 Top w10: v2(3755.75,601.73) CA16.2@3755.75,633.23
  Layer_3 Inner Signal 1 w2.95: v1(252.37,328.57) ccw(c226.96,353.97) 260.52,341.13 ccw(c257.75,342.17) 260.61,342.92 cw(c301.77,353.97) 259.15,353.97 259.15,390.9 cw(c381.23,390.9) 294.88,477.19 298.83,481.14 cw(c435.17,344.8) 394.69,533.32 cw(c435.17,344.8) 435.17,537.62 3582.72,537.62 3602.6,537.62 cw(c3604.07,536.14) 3604.07,538.23 3704.82,538.23 ccw(c3704.82,591.7) 3742.61,553.87 3751.56,562.82 ccw(c3727.05,587.33) 3761.71,587.25 ccw(c3727.05,587.33) 3761.71,587.33 ccw(c3746.87,587.33) 3757.37,597.82 cw(c3761.27,601.73) v2(3755.75,601.73)
  Layer_5 Inner Signal 2 w2.95: J1.98@248.33,369.5 J1.98@249.7,368.13 ; J1.98@249.95,360.43 249.95,367.52 ccw(c277.6,367.52) 258.05,347.97 cw(c251.69,341.61) 260.68,341.61 cw(c249.28,341.61) 257.34,333.54 v1(252.37,328.57)
DOWNLINK6_P: CA16.1 J1.96 | length 3766.4
  Layer_1 Top w10: v2(3775.75,601.73) CA16.1@3775.75,633.23
  Layer_3 Inner Signal 1 w2.95: v1(276.37,328.57) cw(c301.77,353.97) 265.84,353.97 265.84,388.12 cw(c387.93,388.12) 301.6,474.45 cw(c437.94,338.11) 302.81,475.65 cw(c437.94,338.11) 394.01,525.85 cw(c437.94,338.11) 437.94,530.92 3602.6,530.92 cw(c3602.6,529.23) 3603.8,530.43 3604.07,530.16 3627.78,530.16 3708.16,530.16 ccw(c3708.16,583.63) 3745.97,545.82 3757.29,557.14 ccw(c3727.13,587.3) 3757.33,557.18 ccw(c3727.13,587.3) 3769.78,587.2 ccw(c3727.13,587.3) 3769.78,587.3 ; 3769.78,587.33 cw(c3784.62,587.33) 3774.13,597.82 ccw(c3770.22,601.73) v2(3775.75,601.73)
  Layer_5 Inner Signal 2 w2.95: v1(276.37,328.57) 271.72,333.22 cw(c280.89,342.39) 267.92,342.39 cw(c276.11,342.39) 270.31,348.17 271.47,349.34 ccw(c251.31,369.5) J1.96@279.82,369.5
DOWNLINK7_N: CA9.2 J1.56 | length 3516.8
  Layer_1 Top w10: v2(4100.24,798.58) CA9.2@4100.24,830.08
  Layer_5 Inner Signal 2 w2.95: J1.56@909.74,369.5 cw(c939.37,369.5) 918.42,390.45 919.31,391.33 ccw(c911.62,399.02) 922.49,399.02 922.49,407.03 cw(c994.07,407.03) 943.46,457.64 cw(c992.3,408.8) 992.3,477.87 2385.99,477.87 cw(c2385.99,421.09) 2426.14,461.24 ccw(c2459.23,494.33) 2459.23,447.54 3602.48,447.54 cw(c3603.96,446.06) 3603.96,448.15 3616.83,448.15 ccw(c3616.83,510.64) 3661.02,466.45 3802.92,608.36 cw(c3879.22,532.06) 3826.31,626.1 cw(c3879.22,532.06) 3879.22,639.96 4049.24,639.96 ccw(c4049.24,709.19) 4087.27,651.34 ccw(c4049.24,709.19) 4098.19,660.24 ccw(c4078.85,679.58) 4106.2,679.58 4106.2,784.18 ccw(c4091.36,784.18) 4101.85,794.68 cw(c4105.76,798.58) v2(4100.24,798.58)
DOWNLINK7_P: CA9.1 J1.54 | length 3519.2
  Layer_1 Top w10: v2(4120.24,798.58) CA9.1@4120.24,830.08
  Layer_5 Inner Signal 2 w2.95: J1.54@941.24,369.5 ccw(c907.57,369.5) 931.87,392.8 ccw(c907.57,369.5) 931.32,393.37 cw(c938.35,400.28) 929.18,396.65 929.18,407.03 cw(c994.07,407.03) 948.19,452.91 cw(c992.3,408.8) 992.3,471.18 2385.99,471.18 cw(c2385.99,421.09) 2421.45,456.47 ccw(c2459.23,494.33) 2455.84,440.95 2456.46,440.84 3602.48,440.84 cw(c3602.48,439.15) 3603.68,440.35 3603.95,440.08 3616.97,440.08 ccw(c3616.97,510.32) 3666.63,460.65 3808.58,602.6 cw(c3879.29,531.89) 3829.85,618.81 cw(c3879.29,531.89) 3879.29,631.89 4051.97,631.89 ccw(c4051.97,702.61) 4091.54,644 ccw(c4051.97,702.61) 4101.96,652.59 ; 4101.97,652.6 4103.97,654.6 ccw(c4079.09,679.48) 4114.27,679.48 4114.27,784.18 cw(c4129.11,784.18) 4118.62,794.68 ccw(c4114.71,798.58) v2(4120.24,798.58)
GND: CA1.3 CA2.3 CA3.3 CA4.3 CA5.3 CA6.3 CA7.3 CA8.3 CA9.3 CA10.3 CA11.3 CA12.3 CA13.3 CA14.3 CA15.3 CA16.3 CA17.3 CA18.3 CA19.3 CA20.3 CA21.3 CA22.3 CA23.3 CA24.3 CA25.3 CA26.3 CA27.3 CA28.3 CA29.3 CA30.3 CA31.3 CA32.3 J1.3 J1.4 J1.9 J1.10 J1.15 J1.16 J1.21 J1.22 J1.27 J1.28 J1.33 J1.34 J1.39 J1.40 J1.45 J1.46 J1.51 J1.52 J1.57 J1.58 J1.63 J1.64 J1.69 J1.70 J1.75 J1.76 J1.81 J1.82 J1.87 J1.88 J1.93 J1.94 J1.99 J1.100 pad.1 | length 1142
  Layer_5 Inner Signal 2 w10: v1(216.54,335.63) 216.54,369.21 J1.100@216.83,369.5 ; J1.99@217.12,192.63 v1(217.12,226.2) ; v1(311.02,335.63) J1.94@311.02,369.21 ; J1.93@311.61,192.63 v1(311.61,226.2) ; v1(405.51,335.63) J1.88@405.51,369.21 ; J1.87@406.1,192.63 v1(406.1,226.2) ; v1(500,335.63) J1.82@500,369.21 ; J1.81@500.59,192.63 v1(500.59,226.2) ; v1(594.49,335.63) J1.76@594.49,369.21 ; J1.75@595.08,192.63 v1(595.08,226.2) ; v1(688.98,335.63) J1.70@688.98,369.21 ; J1.69@689.57,192.63 v1(689.57,226.2) ; v1(783.46,335.63) J1.64@783.46,369.21 ; J1.63@784.05,192.63 v1(784.05,226.2) ; v1(877.95,335.63) J1.58@877.95,369.21 ; J1.57@878.54,192.63 v1(878.54,226.2) ; v1(972.44,335.63) J1.52@972.44,369.21 ; J1.51@973.03,192.63 v1(973.03,226.2) ; v1(1066.93,335.63) J1.46@1066.93,369.21 ; J1.45@1067.52,192.63 v1(1067.52,226.2) ; v1(1161.42,335.63) J1.40@1161.42,369.21 ; J1.39@1162.01,192.63 v1(1162.01,226.2) ; v1(1255.91,335.63) J1.34@1255.91,369.21 ; J1.33@1256.49,192.63 v1(1256.49,226.2) ; v1(1350.39,335.63) J1.28@1350.39,369.21 ; J1.27@1350.98,192.63 v1(1350.98,226.2) ; v1(1444.88,335.63) J1.22@1444.88,369.21 ; J1.21@1445.47,192.63 v1(1445.47,226.2) ; v1(1539.37,335.63) J1.16@1539.37,369.21 ; J1.15@1539.96,192.63 v1(1539.96,226.2) ; v1(1633.86,335.63) J1.10@1633.86,369.21 ; J1.9@1634.45,192.63 v1(1634.45,226.2) ; v1(1728.35,335.63) J1.4@1728.35,369.21 ; J1.3@1728.94,192.63 v1(1728.94,226.2)
UPLINK0_N: CA18.1 J1.13 | length 2325.9
  Layer_1 Top w10: v2(3785.59,208.03) CA18.1@3785.59,239.53
  Layer_3 Inner Signal 1 w2.95: 1594.47,198.47 1598.06,194.88 ccw(c1606.71,203.54) 1606.71,191.3 1683.9,191.3 3582.8,191.3 3602.6,191.3 cw(c3602.6,189.6) 3603.8,190.8 3604.07,190.53 3765.57,190.53 ccw(c3765.57,212.34) 3780.98,196.91 ccw(c3769.88,208.03) v2(3785.59,208.03)
  Layer_3 Inner Signal 1 w2.99: v1(1574.61,233.27) 1577.96,229.93 cw(c1565.18,217.15) 1583.25,217.15 ccw(c1601.32,217.15) 1588.54,204.37 1594.44,198.47 ; 1590.89,201.98 1592.58,200.3
  Layer_5 Inner Signal 2 w3: J1.13@1571.16,192.33 cw(c1599.67,192.33) 1579.51,212.5 1580.67,213.65 ccw(c1574.88,219.44) 1583.07,219.44 ccw(c1570.1,219.44) 1579.27,228.62 v1(1574.61,233.27)
UPLINK0_P: CA18.2 J1.11 | length 2273.3
  Layer_1 Top w10: v2(3765.59,208.03) CA18.2@3765.59,239.53
  Layer_3 Inner Signal 1 w2.95: 1597.24,205.16 1600.83,201.58 ccw(c1609.48,210.23) 1601.33,201.1 ccw(c1609.48,210.23) 1609.48,197.99 3582.72,197.99 3602.6,197.99 cw(c3604.07,196.52) 3604.07,198.6 3627.04,198.6 3742.83,198.6 ccw(c3742.83,230.79) 3745.15,198.69 ccw(c3742.83,230.79) v2(3765.59,208.03) v2@3772.11,208.03
  Layer_3 Inner Signal 1 w2.99: 1597.24,205.19 1593.81,208.62 cw(c1603.06,217.87) 1589.98,217.87 1589.98,218.54 cw(c1604.69,218.54) 1594.29,228.94 v1(1598.61,233.27)
  Layer_5 Inner Signal 2 w3: J1.11@1593.42,213.37 cw(c1599.09,219.04) 1593.2,213.6 cw(c1599.09,219.04) 1591.07,219.04 1591.07,220.19 cw(c1605.92,217.22) 1595.18,227.9 cw(c1605.92,217.22) 1595.21,227.93 v1@1597.25,229.96 ; J1.11@1601.03,194.31 J1.11@1601.03,201.4 ; J1.11@1601.29,193.71 J1.11@1602.66,192.33
UPLINK1_N: CA19.1 J1.19 | length 2729
  Layer_1 Top w10: v2(3923.39,404.88) CA19.1@3923.39,436.38
  Layer_5 Inner Signal 2 w2.95: J1.19@1476.67,192.33 ccw(c1510.34,192.33) 1486.53,168.53 ; 1486.56,168.5 cw(c1479.56,161.56) 1489.42,161.56 ccw(c1502.61,161.56) 1489.42,161.35 1489.42,159.89 ccw(c1499.79,159.89) 1492.46,152.56 ccw(c1513.5,173.6) 1513.44,143.84 1801.07,143.84 ccw(c1801.07,209.93) 1847.8,163.2 cw(c1875.51,135.49) 1875.51,174.68 3602.44,174.68 cw(c3602.44,172.98) 3603.64,174.18 3603.91,173.91 3885.13,173.91 ccw(c3885.13,198.88) 3902.76,181.21 3911.16,189.61 ccw(c3896.06,204.72) 3914.19,193.42 ccw(c3896.06,204.72) 3917.42,204.72 3917.42,390.48 cw(c3932.26,390.48) 3921.77,400.97 ccw(c3917.86,404.88) v2(3923.39,404.88)
UPLINK1_P: CA19.2 J1.17 | length 2718.6
  Layer_1 Top w10: v2(3903.39,404.88) CA19.2@3903.39,436.38
  Layer_5 Inner Signal 2 w2.95: J1.17@1508.17,192.33 cw(c1478.54,192.33) 1499.49,171.39 1498.61,170.5 ccw(c1506.29,162.81) 1495.99,166.28 ccw(c1498.8,165.36) 1496.11,164.13 1496.12,159.89 ccw(c1499.79,159.89) 1497.19,157.29 ccw(c1513.5,173.6) 1513.43,150.54 1801.18,150.54 ccw(c1801.07,209.93) 1843.07,167.93 cw(c1875.51,135.49) 1872.1,181.25 ccw(c1871.85,184.19) 1872.74,181.37 3595.98,181.37 ; 3582.56,181.37 3595.98,181.37 ; 3903.09,192.95 3899.44,189.3 cw(c3881.78,206.95) 3881.78,181.98 3626.88,181.98 3603.92,181.98 ccw(c3603.92,179.9) 3602.44,181.37 3595.98,181.37 ; 3903.11,192.97 ccw(c3887.99,208.06) 3909.35,208.06 3909.35,390.48 ccw(c3894.51,390.48) 3905,400.97 cw(c3908.91,404.88) v2(3903.39,404.88)
UPLINK2_N: CA20.1 J1.25 | length 2642.2
  Layer_1 Top w10: v2(3884.02,208.03) CA20.1@3884.02,239.53
  Layer_3 Inner Signal 1 w2.95: v1(1385.64,233.27) cw(c1364.75,212.38) 1394.29,212.38 1394.29,197.74 ccw(c1418.23,197.74) 1401.3,180.81 1404.39,177.72 ccw(c1427.89,201.22) 1427.8,167.99 ccw(c1427.89,201.22) 1427.89,167.99 1463.11,167.99 3582.68,167.99 3602.48,167.99 cw(c3602.48,166.29) 3603.68,167.49 3603.95,167.23 3627.66,167.23 3834.45,167.23 ccw(c3834.45,213.65) 3860.36,175.12 ccw(c3834.45,213.65) 3866.35,179.92 ccw(c3834.45,213.65) 3867.28,180.82 3875.16,188.7 ccw(c3868.17,195.69) 3878.05,195.69 cw(c3887.93,195.69) 3880.94,202.67 v2@3882.4,204.12 ; v2@3882.41,204.13 ccw(c3878.49,208.03) v2(3884.02,208.03)
  Layer_5 Inner Signal 2 w3: J1.25@1382.18,192.33 cw(c1410.7,192.33) 1390.54,212.5 1391.7,213.66 ccw(c1385.9,219.44) 1394.09,219.44 ccw(c1381.12,219.44) 1390.29,228.62 v1(1385.64,233.27)
UPLINK2_P: CA20.2 J1.23 | length 2625.5
  Layer_1 Top w10: v2(3864.02,208.03) CA20.2@3864.02,239.53
  Layer_3 Inner Signal 1 w2.95: v1(1409.64,233.27) ccw(c1430.53,212.38) 1400.98,212.38 1400.98,197.78 ccw(c1418.33,197.78) 1406.06,185.52 1409.1,182.48 ccw(c1427.93,201.31) 1427.85,174.68 ccw(c1427.93,201.31) 1427.93,174.68 3582.6,174.68 3602.48,174.68 cw(c3603.96,173.21) 3603.96,175.3 3626.92,175.3 3834.33,175.3 ccw(c3834.33,213.95) 3855.3,181.48 ccw(c3834.33,213.95) 3861.66,186.62 3868.27,193.23 ccw(c3864.14,197.36) 3869.8,195.93 ccw(c3864.14,197.36) 3869.98,197.36 ccw(c3864.14,197.36) 3868.28,201.48 3865.63,204.12 cw(c3869.54,208.03) v2(3864.02,208.03)
  Layer_5 Inner Signal 2 w3: v1(1409.64,233.27) 1404.66,228.29 ccw(c1412.73,220.23) 1401.32,220.23 ccw(c1410.32,220.23) 1403.96,213.87 cw(c1384.4,194.31) 1412.06,194.31 J1.23@1412.06,201.4 ; J1.23@1412.31,193.71 J1.23@1413.68,192.33
UPLINK3_N: CA21.1 J1.31 | length 3034.3
  Layer_1 Top w10: v2(4021.81,404.88) CA21.1@4021.81,436.38
  Layer_5 Inner Signal 2 w2.95: J1.31@1287.7,192.33 ccw(c1321.36,192.33) 1297.56,168.53 ; 1297.6,168.49 cw(c1291.03,161.95) 1298.43,167.53 cw(c1291.03,161.95) 1300.3,161.95 1300.3,158.17 ccw(c1333.52,158.17) 1310.03,134.69 ccw(c1335.21,155.9) 1335.16,122.98 1834.87,122.98 ccw(c1834.87,176.52) 1872.73,138.66 cw(c1899.96,111.43) 1899.96,149.94 3602.32,149.94 cw(c3602.32,148.24) 3603.52,149.44 3603.79,149.17 3923.1,149.17 ccw(c3923.1,257.07) 3999.39,180.77 4001.81,183.19 ; 4001.82,183.21 ccw(c3967.91,217.08) 4015.85,217.08 4015.85,390.48 cw(c4030.69,390.48) 4020.19,400.97 ccw(c4016.29,404.88) v2(4021.81,404.88)
UPLINK3_P: CA21.2 J1.29 | length 3023.7
  Layer_1 Top w10: v2(4001.81,404.88) CA21.2@4001.81,436.38
  Layer_5 Inner Signal 2 w2.95: J1.29@1319.19,192.33 cw(c1289.57,192.33) 1310.51,171.39 1309.63,170.5 ccw(c1317.32,162.81) 1307.05,166.4 ccw(c1309.85,165.46) 1306.99,164.72 1306.99,158.17 ccw(c1333.52,158.17) 1314.71,139.47 cw(c1310.03,134.69) 1315.13,139.02 ccw(c1335.21,155.9) 1335.13,129.67 1834.96,129.67 ccw(c1834.87,176.52) 1867.98,143.38 cw(c1899.96,111.43) 1896.54,156.5 ccw(c1896.28,159.44) 1897.18,156.63 3595.28,156.63 ; 3582.44,156.63 3595.28,156.63 ; 3993.74,186.53 cw(c3923.03,257.24) 3923.03,157.24 3626.77,157.24 3603.8,157.24 ccw(c3603.8,155.15) 3602.32,156.63 3595.28,156.63 ; 3993.75,186.55 ccw(c3959.84,220.43) 4007.78,220.43 4007.78,390.48 ccw(c3992.94,390.48) 4003.43,400.97 cw(c4007.34,404.88) v2(4001.81,404.88)
UPLINK4_N: CA22.1 J1.37 | length 2961.6
  Layer_1 Top w10: v2(3972.6,208.03) CA22.1@3972.6,239.53
  Layer_3 Inner Signal 1 w2.95: v1(1196.66,233.27) cw(c1175.77,212.38) 1205.32,212.38 1205.32,183.19 ccw(c1249.27,183.19) 1218.19,152.11 1221.06,149.23 ccw(c1241.27,169.44) 1241.27,140.87 1277.72,140.87 3582.72,140.87 3602.52,140.87 cw(c3602.52,139.17) 3603.72,140.37 3603.99,140.1 3627.7,140.1 3824.68,140.1 3900.88,140.1 ccw(c3900.88,209.59) 3950,160.44 ; 3950.02,160.45 3959.2,169.64 ccw(c3941.27,187.58) 3966.63,187.58 3966.63,193.63 cw(c3981.47,193.63) 3968.35,200.55 cw(c3981.47,193.63) 3970.98,204.12 ccw(c3967.07,208.03) v2(3972.6,208.03)
  Layer_5 Inner Signal 2 w3: J1.37@1193.21,192.33 cw(c1221.72,192.33) 1201.56,212.5 1202.71,213.65 ccw(c1196.92,219.44) 1205.11,219.44 ccw(c1192.14,219.44) 1201.31,228.62 v1(1196.66,233.27)
UPLINK4_P: CA22.2 J1.35 | length 2944.2
  Layer_1 Top w10: v2(3952.6,208.03) CA22.2@3952.6,239.53
  Layer_3 Inner Signal 1 w2.95: v1(1220.66,233.27) ccw(c1241.55,212.38) 1212.01,212.38 1212.01,185.96 ccw(c1255.96,185.96) 1224.88,154.88 1225.75,154.02 ccw(c1241.34,169.6) 1241.27,147.56 ccw(c1241.34,169.6) 1241.34,147.56 3582.64,147.56 3602.52,147.56 cw(c3604,146.08) 3604,148.17 3626.96,148.17 3821.33,148.17 3897.53,148.17 ccw(c3897.53,217.66) 3946.67,168.52 3953.46,175.31 ccw(c3941.13,187.64) 3958.56,187.64 3958.56,193.63 ccw(c3943.72,193.63) 3956.85,200.55 ccw(c3943.72,193.63) 3954.22,204.12 cw(c3958.12,208.03) v2(3952.6,208.03)
  Layer_5 Inner Signal 2 w3: v1(1220.66,233.27) 1215.69,228.29 ccw(c1223.75,220.23) 1212.35,220.23 ccw(c1221.34,220.23) 1214.98,213.87 cw(c1195.43,194.31) 1223.08,194.31 J1.35@1223.08,201.4 ; J1.35@1223.33,193.71 J1.35@1224.7,192.33
UPLINK5_N: CA23.1 J1.43 | length 3350.5
  Layer_1 Top w10: v2(4120.24,404.88) CA23.1@4120.24,436.38
  Layer_5 Inner Signal 2 w2.95: J1.43@1098.72,192.33 ccw(c1132.39,192.33) 1108.58,168.53 ; 1108.63,168.48 cw(c1102.42,162.31) 1109.04,168.03 cw(c1102.42,162.31) 1111.17,162.31 1111.17,139.96 ccw(c1141.16,139.96) 1119.96,118.76 ccw(c1159.29,158.09) 1159.24,102.46 1867.77,102.46 ccw(c1867.77,152.43) 1903.1,117.1 cw(c1923.23,96.97) 1923.23,125.44 3602.32,125.44 cw(c3602.32,123.74) 3603.52,124.94 3603.79,124.67 4002.18,124.67 ccw(c4002.18,232.57) 4078.48,156.27 4094.09,171.89 ; 4094.11,171.91 ccw(c4045.37,220.61) 4112.05,203.25 ccw(c4045.37,220.61) 4114.27,220.61 4114.27,390.48 cw(c4129.11,390.48) 4118.62,400.97 ccw(c4114.71,404.88) v2(4120.24,404.88)
UPLINK5_P: CA23.2 J1.41 | length 3339.8
  Layer_1 Top w10: v2(4100.24,404.88) CA23.2@4100.24,436.38
  Layer_5 Inner Signal 2 w2.95: J1.41@1130.22,192.33 cw(c1100.59,192.33) 1121.54,171.39 1120.65,170.5 ccw(c1128.34,162.81) 1117.87,165.73 1117.86,165.32 ccw(c1120.81,165.27) 1117.87,165.08 1117.87,139.96 ccw(c1141.16,139.96) 1124.66,123.52 ccw(c1159.29,158.09) 1159.19,109.16 1867.86,109.16 ccw(c1867.77,152.43) 1898.34,121.8 cw(c1923.23,96.97) 1919.73,131.96 ccw(c1919.41,134.89) 1920.46,132.13 3595.2,132.13 ; 3582.44,132.13 3595.2,132.13 ; v2(4100.24,404.88) ccw(c4105.76,404.88) 4101.85,400.97 cw(c4091.36,390.48) 4106.2,390.48 4106.2,223.95 cw(c4037.3,223.95) 4103.98,206.59 cw(c4037.3,223.95) 4086.02,175.23 4072.82,162.03 cw(c4002.11,232.74) 4002.11,132.74 3626.77,132.74 3603.8,132.74 ccw(c3603.8,130.65) 3602.32,132.13 3595.2,132.13
UPLINK6_N: CA2.1 J1.14 | length 3286.2
  Layer_1 Top w10: v2(4464.72,601.73) CA2.1@4464.72,633.23
  Layer_3 Inner Signal 1 w2.95: v1(1575.2,328.57) cw(c1554.9,308.26) 1583.61,308.26 1583.61,302.6 ccw(c1602.69,302.6) 1589.2,289.11 1590.56,287.76 ccw(c1605.18,302.38) 1605.18,281.7 1697.79,281.7 cw(c1697.79,208.49) 1749.56,260.26 1759.47,250.35 ccw(c1834.42,325.3) 1834.42,219.3 1992.19,219.3 ccw(c1992.19,325.3) 2067.15,250.35 2086.24,269.44 cw(c2161.12,194.56) 2140.73,298.48 cw(c2161.12,194.56) 2140.86,298.5 cw(c2156.15,206.56) 2156.15,299.76 3602.6,299.76 cw(c3602.6,298.07) 3603.8,299.27 3604.07,299 3627.78,299 4323.4,299 ccw(c4323.4,419.14) 4408.36,334.19 4418.69,344.52 ccw(c4321.94,441.26) 4458.76,441.26 4458.76,587.33 cw(c4473.6,587.33) 4460.47,594.25 cw(c4473.6,587.33) 4463.11,597.82 ccw(c4459.2,601.73) v2(4464.72,601.73)
  Layer_5 Inner Signal 2 w3: J1.14@1571.16,369.5 J1.14@1572.53,368.13 ; J1.14@1572.78,360.43 1572.78,367.52 ccw(c1600.44,367.52) 1580.88,347.97 cw(c1574.52,341.61) 1583.52,341.61 cw(c1572.12,341.61) 1580.18,333.54 v1(1575.2,328.57)
UPLINK6_P: CA2.2 J1.12 | length 3264.5
  Layer_1 Top w10: v2(4444.72,601.73) CA2.2@4444.72,633.23
  Layer_3 Inner Signal 1 w2.95: v1(1599.2,328.57) ccw(c1622.35,305.42) 1590.6,313.38 ccw(c1622.35,305.42) 1590.31,312.15 ccw(c1593.21,311.57) 1590.31,311.03 1590.31,302.6 ccw(c1602.69,302.6) 1593.95,293.83 1595.29,292.49 ccw(c1605.18,302.38) 1605.18,288.39 1700.56,288.39 ccw(c1701.2,291.28) 1701.05,288.33 cw(c1697.79,208.49) 1751.94,267.25 ccw(c1753.91,269.44) 1752.33,266.95 ; 1752.33,266.95 1764.22,255.06 ccw(c1834.42,325.3) 1834.42,225.99 1992.19,225.99 ccw(c1992.19,325.3) 2062.39,255.06 2083.47,276.13 ccw(c2081.78,278.56) 2083.78,276.38 cw(c2161.12,194.56) 2098.1,287.86 ; 3582.72,306.46 3602.6,306.46 cw(c3604.07,304.98) 3604.07,307.07 4323.36,307.07 ccw(c4323.36,419.24) 4345.24,309.22 ccw(c4323.36,419.24) 4402.68,339.92 4410.61,347.86 ccw(c4313.87,444.61) 4450.69,444.61 4450.69,587.33 ccw(c4435.85,587.33) 4448.98,594.25 ccw(c4435.85,587.33) 4446.34,597.82 cw(c4450.25,601.73) v2(4444.72,601.73) ; 3590.87,306.46 2156.15,306.46 ccw(c2156.15,206.56) 2098.21,287.94 2098.15,287.89 ; 2098.1,287.86 ccw(c2096.43,290.3) 2098.15,287.89
  Layer_5 Inner Signal 2 w3: v1(1599.2,328.57) 1594.55,333.22 cw(c1603.72,342.39) 1590.75,342.39 cw(c1598.94,342.39) 1593.14,348.17 1594.31,349.34 ccw(c1574.14,369.5) J1.12@1602.66,369.5
UPLINK7_N: CA3.2 J1.20 | length 3325.8
  Layer_1 Top w10: v2(4395.51,798.58) CA3.2@4395.51,830.08
  Layer_5 Inner Signal 2 w2.95: J1.20@1476.67,369.5 cw(c1506.3,369.5) 1485.35,390.45 1486.24,391.33 ccw(c1478.55,399.02) 1489.42,399.02 1489.42,400 cw(c1505.21,400) 1489.85,403.64 1490.11,404.61 1490.39,405.87 cw(c1501.92,403.31) 1493.56,411.66 cw(c1514.55,390.67) 1511,420.14 ccw(c1510.62,423.07) 1511.78,420.35 2262.18,420.35 ccw(c2262.73,423.26) 2262.61,420.31 cw(c2259.41,314.82) 2334.04,389.44 2364.68,358.8 ccw(c2430.69,424.75) 2382.82,344.66 ccw(c2435.06,435.04) 2409.29,333.87 2409.37,333.86 ccw(c2430.94,425) 2430.8,331.34 3602.48,331.34 cw(c3603.96,329.86) 3603.96,331.95 3615.44,331.95 ccw(c3615.44,419.24) 3677.16,357.52 3749.66,430.01 cw(c3825.95,353.71) 3749.72,430.08 cw(c3825.95,353.71) 3754.1,434.21 cw(c3825.95,353.71) 3825.95,461.61 ccw(c3825.95,511.79) 3861.43,476.31 3879.65,494.53 cw(c3922.7,451.48) 3922.7,512.36 4314.64,512.36 ccw(c4314.64,585.86) 4366.61,533.89 4372.19,539.47 ccw(c4301.48,610.18) 4401.48,610.18 4401.48,784.18 ccw(c4386.64,784.18) 4397.13,794.68 cw(c4401.04,798.58) v2(4395.51,798.58)
UPLINK7_P: CA3.1 J1.18 | length 3327.8
  Layer_1 Top w10: v2(4415.51,798.58) CA3.1@4415.51,830.08
  Layer_5 Inner Signal 2 w2.95: 1498.28,393.33 cw(c1501.85,396.9) 1496.8,396.9 1496.8,403.31 cw(c1501.92,403.31) 1498.3,406.94 cw(c1514.55,390.67) 1514.55,413.66 2259.46,413.66 cw(c2259.41,314.82) 2329.3,384.71 2359.98,354.04 ccw(c2430.94,425) 2430.94,324.65 3602.48,324.65 cw(c3602.48,322.95) 3603.68,324.15 3603.95,323.88 3615.6,323.88 ccw(c3615.6,418.86) 3682.76,351.7 3755.31,424.25 cw(c3826.02,353.54) 3826.02,453.54 ccw(c3826.03,511.6) 3867.08,470.55 3885.28,488.74 cw(c3922.82,451.2) 3922.82,504.29 4317.98,504.29 ccw(c4317.98,577.79) 4369.95,525.82 4377.94,533.81 ccw(c4301.65,610.11) 4409.55,610.11 4409.55,784.18 cw(c4424.39,784.18) 4413.89,794.68 ccw(c4409.99,798.58) v2(4415.51,798.58) ; 1498.31,393.31 cw(c1474.5,369.5) J1.18@1508.17,369.5
UPLINK8_N: CA4.2 J1.26 | length 3415.9
  Layer_1 Top w10: v2(4346.3,601.73) CA4.2@4346.3,633.23
  Layer_3 Inner Signal 1 w2.95: v1(1386.23,328.57) 1390.32,332.66 ccw(c1378.49,344.5) 1395.23,344.5 1395.23,345.13 cw(c1419.57,345.13) 1395.69,349.84 cw(c1419.57,345.13) 1402.36,362.34 cw(c1422.4,342.3) 1422.4,370.65 1712.77,370.65 cw(c1712.77,297.57) 1764.44,349.24 cw(c1743.54,328.34) 1773.1,328.34 1773.1,309.6 ccw(c1810.28,309.6) 1776.54,293.98 ccw(c1810.28,309.6) 1783.99,283.31 1792.8,274.5 ccw(c1852.67,334.37) 1852.67,249.7 1959.31,249.7 ccw(c1959.31,349.7) 2030.02,278.99 2067.93,316.9 cw(c2138.15,246.68) 2067.98,316.95 2069.86,318.83 ccw(c2068.2,321.27) 2070.2,319.1 cw(c2138.64,246.19) 2080.03,327.21 2081.6,328.79 ccw(c2081.38,331.73) 2083.03,329.28 2083.97,329.9 cw(c2138.15,246.68) 2138.15,345.98 3590,345.98 ; 3582.6,345.98 3602.48,345.98 cw(c3603.96,344.51) 3603.96,346.6 3626.92,346.6 3687.64,346.6 3695.2,346.6 cw(c3695.2,310.92) 3720.42,336.15 3720.51,336.06 ccw(c3734.67,350.22) 3734.67,330.2 4256.06,330.2 ccw(c4256.06,416.22) 4316.89,355.39 ccw(c4231.49,440.79) 4339.25,386.26 ccw(c4231.49,440.79) 4352.26,440.79 4352.26,587.33 ccw(c4337.43,587.33) 4350.55,594.25 ccw(c4337.43,587.33) 4347.92,597.83 cw(c4351.83,601.73) v2(4346.3,601.73)
  Layer_5 Inner Signal 2 w3: J1.26@1382.18,369.5 J1.26@1383.56,368.13 ; J1.26@1383.81,360.43 1383.81,367.52 ccw(c1411.46,367.52) 1391.91,347.97 cw(c1385.55,341.61) 1394.54,341.61 cw(c1383.14,341.61) 1391.2,333.54 v1(1386.23,328.57)